# Allegro board SMA_fabB_v1_auto - Copy.brd
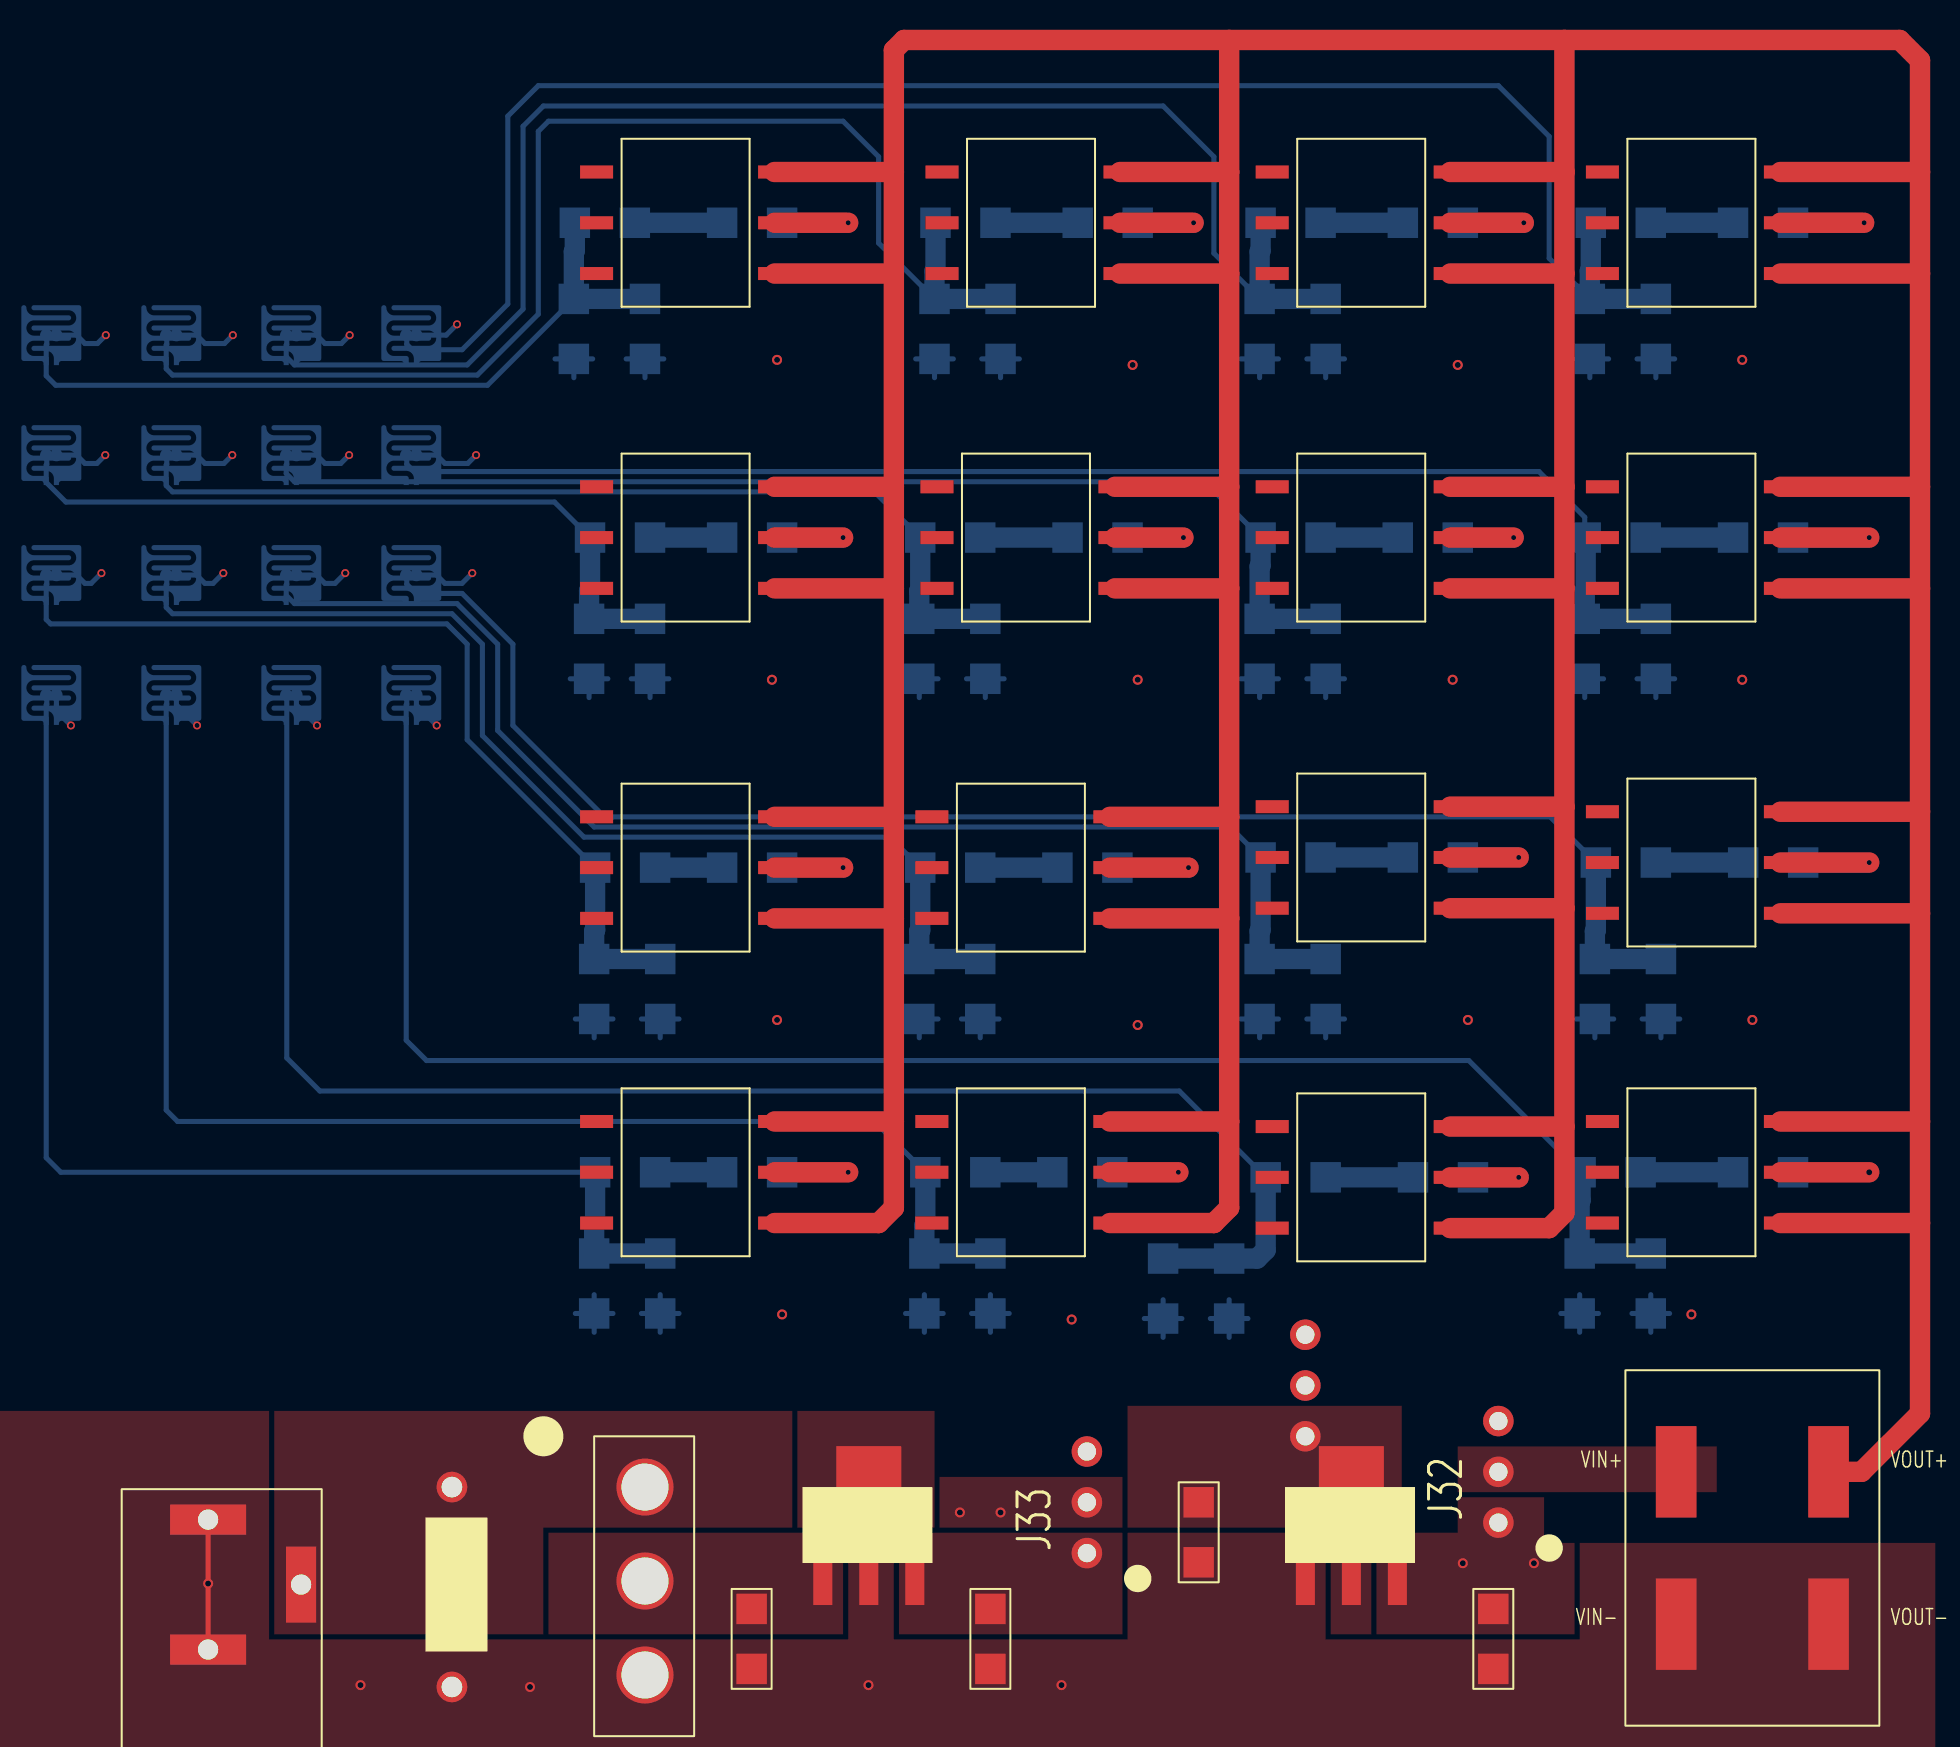
[diagram p0: board, top side]
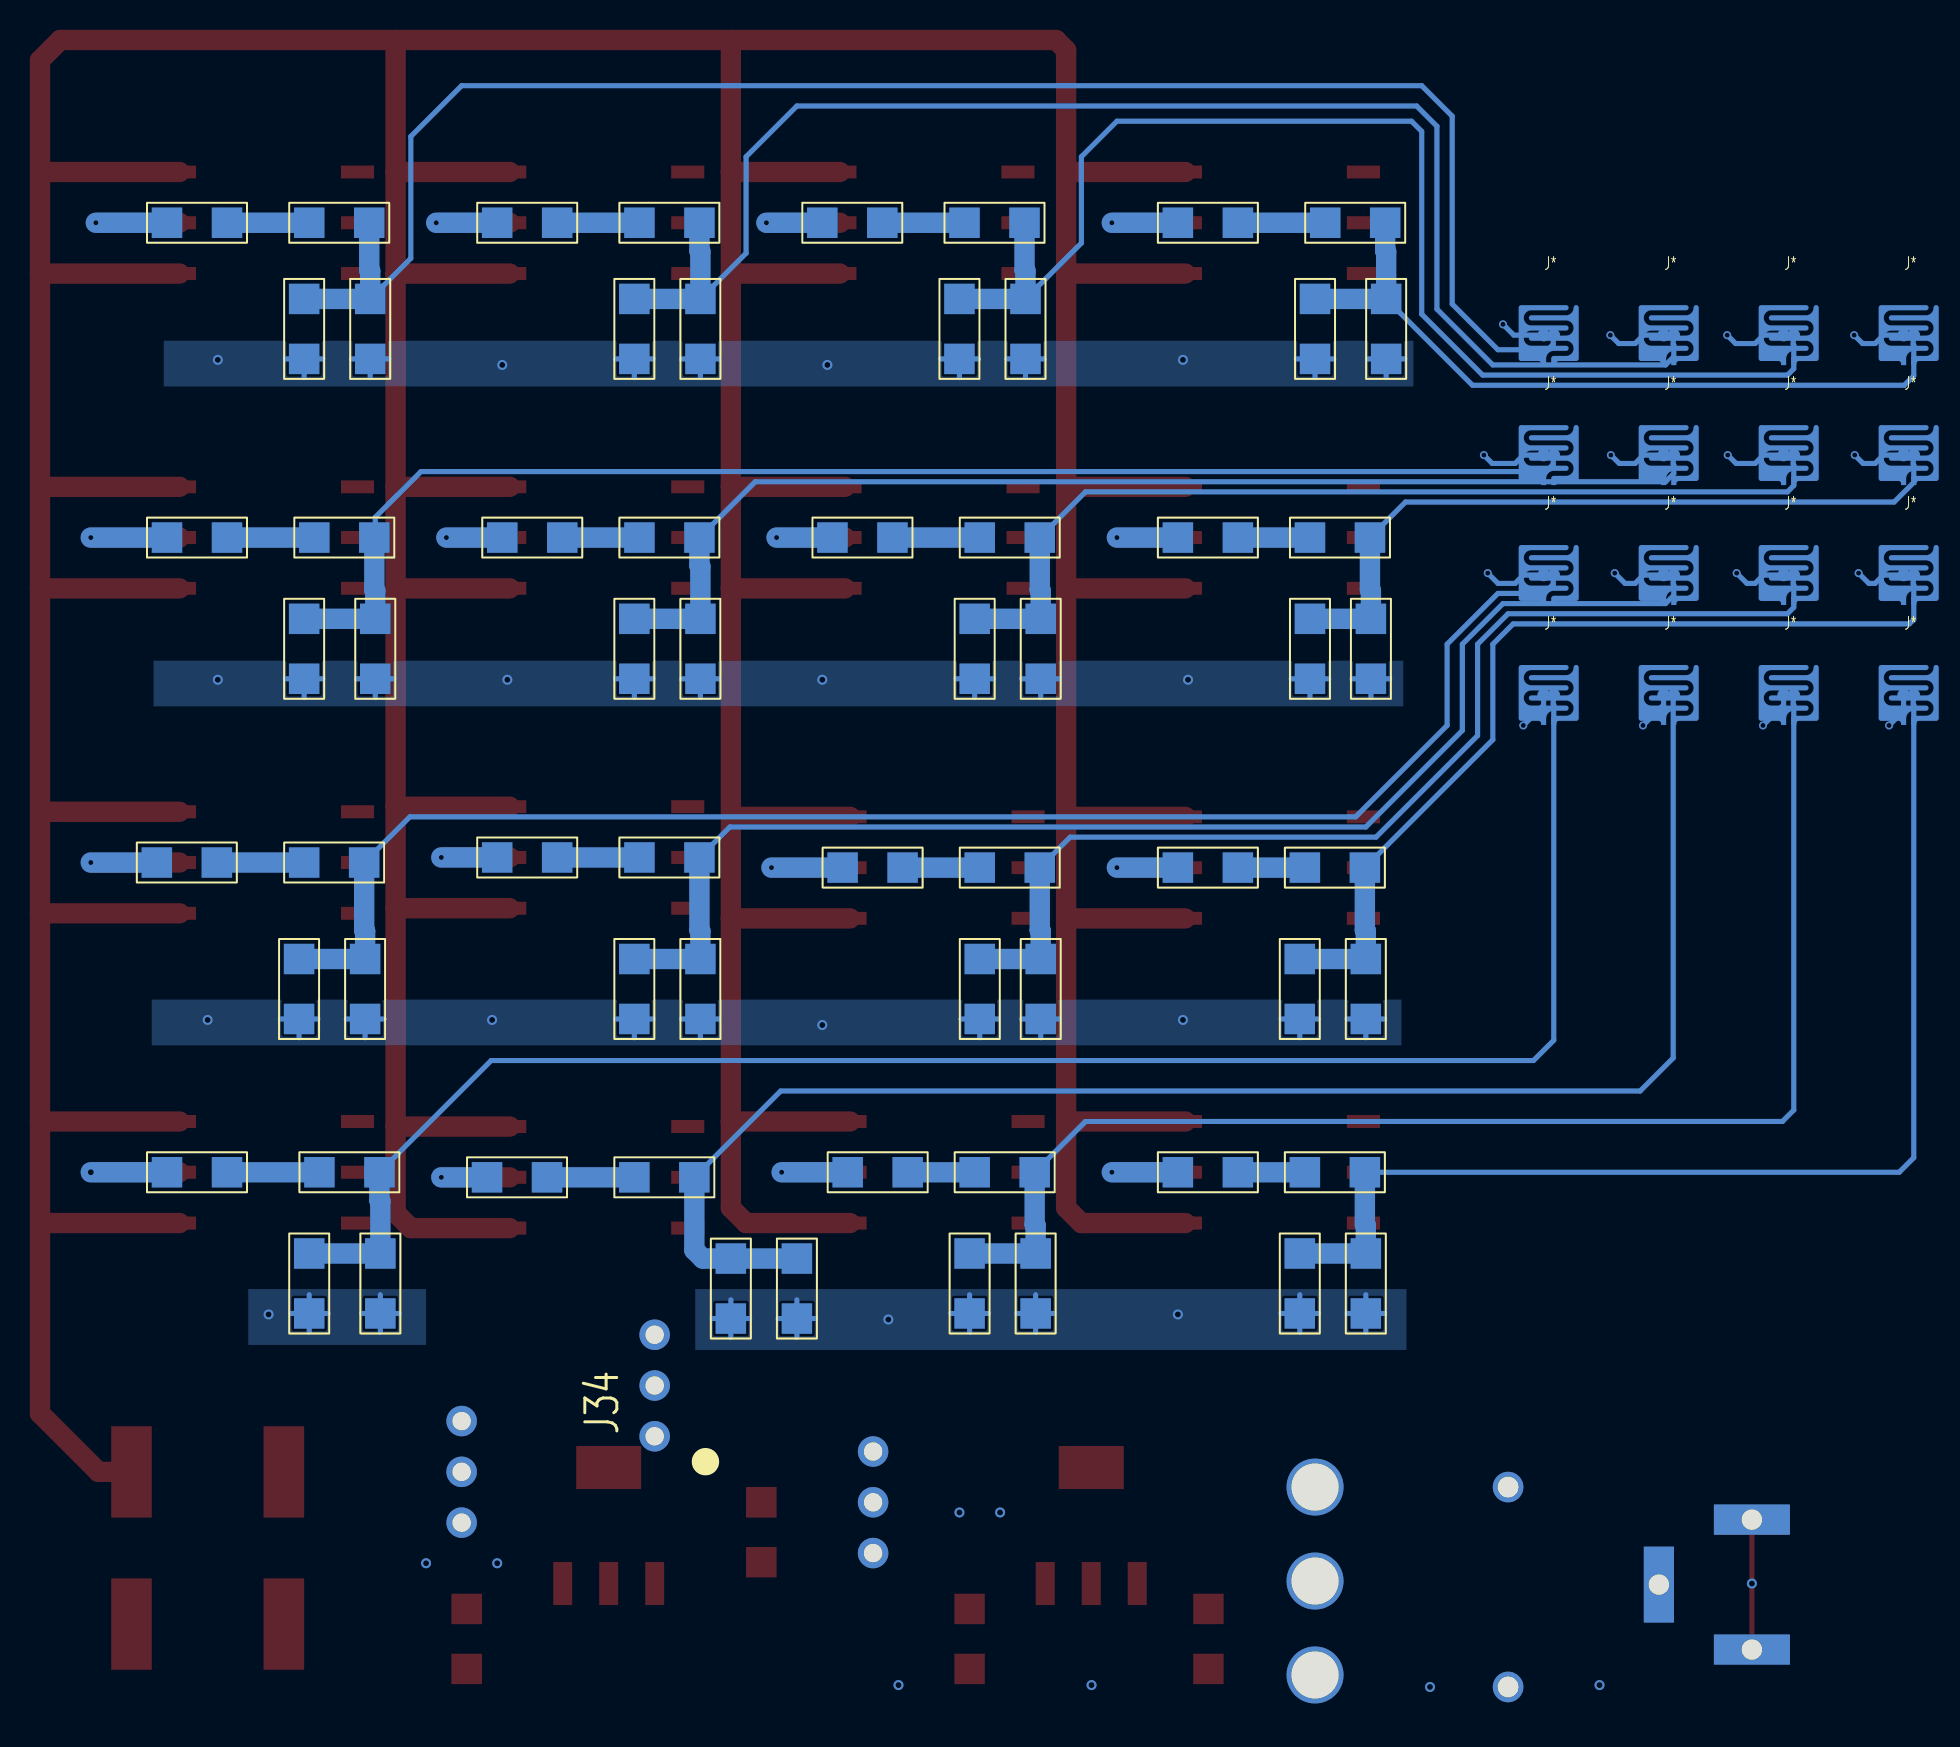
[diagram p1: board, bottom side, seen from below]

No outline. copper layers: TOP, GND, VDD, BOTTOM. Coordinates in mm from the lowest, leftmost part position.

## Design rules (mm)
constraint set DEFAULT: min track width 0.254, pair gap 0.5
net group USB: nets USB_D+ USB_D-
net group USB_CONN: nets USB_D+_CONN USB_D-_CONN
net group USB_FT: nets FT_D+ FT_D-
net group VSTATIC: nets E0_STAT E1_STAT E2_STAT E3_STAT E4_STAT E5_STAT E6_STAT E7_STAT E8_STAT E9_STAT E10_STAT E11_STAT E12_STAT E13_STAT E14_STAT E15_STAT V_STAT

## Placement (name value [footprint] x y rotation side)
C5  0.33uF  [1206_C]  35.02 0 270 top
C6  0.1uF  [1206_C]  46.96 0 270 top
C7  1uF  [1206_C]  72.1 0 270 top
C8  1uF  [1206_C]  57.37 5.33 270 top
C18  0.1uF  [1206_C]  76.42 17.78 270 bottom
C19  0.1uF  [1206_C]  79.98 17.78 270 bottom
C20  0.1uF  [1206_C]  77.18 32.51 270 bottom
C21  0.1uF  [1206_C]  80.48 32.51 270 bottom
C22  0.1uF  [1206_C]  76.67 49.53 270 bottom
C23  0.1uF  [1206_C]  80.23 49.53 270 bottom
C24  0.1uF  [1206_C]  76.93 65.53 270 bottom
C25  0.1uF  [1206_C]  80.23 65.53 270 bottom
C26  0.1uF  [1206_C]  55.59 17.53 270 bottom
C27  0.1uF  [1206_C]  58.89 17.53 270 bottom
C28  0.1uF  [1206_C]  60.42 32.51 270 bottom
C29  0.1uF  [1206_C]  63.72 32.51 270 bottom
C30  0.1uF  [1206_C]  60.42 49.53 270 bottom
C31  0.1uF  [1206_C]  63.72 49.53 270 bottom
C32  0.1uF  [1206_C]  63.72 65.53 270 bottom
C33  0.1uF  [1206_C]  60.42 65.53 270 bottom
C34  0.1uF  [1206_C]  43.65 17.78 270 bottom
C35  0.1uF  [1206_C]  46.96 17.78 270 bottom
C36  0.1uF  [1206_C]  43.4 32.51 270 bottom
C37  0.1uF  [1206_C]  46.45 32.51 270 bottom
C38  0.1uF  [1206_C]  43.4 49.53 270 bottom
C39  0.1uF  [1206_C]  46.7 49.53 270 bottom
C40  0.1uF  [1206_C]  44.16 65.53 270 bottom
C41  0.1uF  [1206_C]  47.46 65.53 270 bottom
C42  0.1uF  [1206_C]  30.45 17.78 270 bottom
C43  0.1uF  [1206_C]  27.14 17.78 270 bottom
C44  0.1uF  [1206_C]  27.14 32.51 270 bottom
C45  0.1uF  [1206_C]  30.45 32.51 270 bottom
C46  0.1uF  [1206_C]  26.89 49.53 270 bottom
C47  0.1uF  [1206_C]  29.94 49.53 270 bottom
C48  0.1uF  [1206_C]  26.13 65.53 270 bottom
C49  0.1uF  [1206_C]  29.68 65.53 270 bottom
D5  -  [SA14A]  20.03 6.1 270 top
J3  EJ503A_0  [EJ503A]  7.84 4.47 0 top
J14  -  [1103M2S3CQE2]  29.68 6.1 0 top
J15  comb_electrode  [COMB_ELECTRODE_FULL]  18 46.74 180 bottom
J16  comb_electrode  [COMB_ELECTRODE_FULL]  18 52.74 180 bottom
J17  comb_electrode  [COMB_ELECTRODE_FULL]  18 58.74 180 bottom
J18  comb_electrode  [COMB_ELECTRODE_FULL]  18 64.74 180 bottom
J19  comb_electrode  [COMB_ELECTRODE_FULL]  12 46.74 180 bottom
J20  comb_electrode  [COMB_ELECTRODE_FULL]  12 52.74 180 bottom
J21  comb_electrode  [COMB_ELECTRODE_FULL]  12 58.74 180 bottom
J22  comb_electrode  [COMB_ELECTRODE_FULL]  12 64.74 180 bottom
J23  comb_electrode  [COMB_ELECTRODE_FULL]  6 46.74 180 bottom
J24  comb_electrode  [COMB_ELECTRODE_FULL]  6 52.74 180 bottom
J25  comb_electrode  [COMB_ELECTRODE_FULL]  6 58.74 180 bottom
J26  comb_electrode  [COMB_ELECTRODE_FULL]  6 64.74 180 bottom
J27  comb_electrode  [COMB_ELECTRODE_FULL]  0 46.74 180 bottom
J28  comb_electrode  [COMB_ELECTRODE_FULL]  0 52.74 180 bottom
J29  comb_electrode  [COMB_ELECTRODE_FULL]  0 58.74 180 bottom
J30  comb_electrode  [COMB_ELECTRODE_FULL]  0 64.74 180 bottom
J32  HDR3x1  [CONN3]  72.36 4.32 90 top
J33  HDR3x1  [CONN3]  51.78 2.79 90 top
J34  HDR3x1  [CONN3]  62.7 8.64 90 bottom
R16  1M  [1206_R]  87.09 21.84 180 bottom
R17  1M  [1206_R]  79.47 21.84 180 bottom
R18  1M  [1206_R]  87.6 37.34 180 bottom
R19  1M  [1206_R]  80.23 37.34 180 bottom
R20  1M  [1206_R]  87.09 53.59 180 bottom
R21  1M  [1206_R]  79.72 53.59 180 bottom
R22  1M  [1206_R]  87.09 69.34 180 bottom
R23  1M  [1206_R]  79.98 69.34 180 bottom
R24  1M  [1206_R]  71.09 21.59 180 bottom
R25  1M  [1206_R]  63.72 21.59 180 bottom
R26  1M  [1206_R]  70.58 37.59 180 bottom
R27  1M  [1206_R]  63.47 37.59 180 bottom
R28  1M  [1206_R]  70.32 53.59 180 bottom
R29  1M  [1206_R]  63.47 53.59 180 bottom
R30  1M  [1206_R]  70.58 69.34 180 bottom
R31  1M  [1206_R]  63.47 69.34 180 bottom
R32  1M  [1206_R]  53.05 21.84 180 bottom
R33  1M  [1206_R]  46.7 21.84 180 bottom
R34  1M  [1206_R]  53.31 37.08 180 bottom
R35  1M  [1206_R]  46.45 37.08 180 bottom
R36  1M  [1206_R]  53.81 53.59 180 bottom
R37  1M  [1206_R]  46.45 53.59 180 bottom
R38  1M  [1206_R]  54.32 69.34 180 bottom
R39  1M  [1206_R]  47.21 69.34 180 bottom
R40  1M  [1206_R]  36.54 21.84 180 bottom
R41  1M  [1206_R]  30.19 21.84 180 bottom
R42  1M  [1206_R]  36.54 37.08 180 bottom
R43  1M  [1206_R]  30.19 37.08 180 bottom
R44  1M  [1206_R]  36.54 53.59 180 bottom
R45  1M  [1206_R]  29.94 53.59 180 bottom
R46  1M  [1206_R]  36.54 69.34 180 bottom
R47  1M  [1206_R]  29.18 69.34 180 bottom
U3  -  [UA78M05CDCY]  38.57 1.27 0 top
U4  TLV1117LV33DCYT_1  [TLV1117LV33DCYT]  62.7 1.27 0 top
U5  -  [B00JVJDEZE]  81.25 4.32 0 top
U9  -  [PLA170]  82.01 21.84 0 top
U10  -  [PLA170]  82.01 37.34 0 top
U11  -  [PLA170]  82.01 53.59 0 top
U12  -  [PLA170]  82.01 69.34 0 top
U13  -  [PLA170]  65.5 21.59 0 top
U14  -  [PLA170]  65.5 37.59 0 top
U15  -  [PLA170]  65.5 53.59 0 top
U16  -  [PLA170]  65.5 69.34 0 top
U17  -  [PLA170]  48.48 21.84 0 top
U18  -  [PLA170]  48.48 37.08 0 top
U19  -  [PLA170]  48.73 53.59 0 top
U20  -  [PLA170]  48.99 69.34 0 top
U21  -  [PLA170]  31.72 21.84 0 top
U22  -  [PLA170]  31.72 37.08 0 top
U23  -  [PLA170]  31.72 53.59 0 top
U24  -  [PLA170]  31.72 69.34 0 top

## Library data of the parts
C5-C8 C18-C49 = CAP
D5 = SA14A_0
J3 = EJ503A_0
J14 = 1103M2S3CQE2
J15-J30 = comb_electrode_1
J32-J34 = HDR3x1
R16-R47 = RESISTOR
U3 = UA78M05CDCY_0
U4 = TLV1117LV33DCYT_2
U5 = B00JVJDEZE
U9-U24 = PLA170

## Footprints (pads in the part's own frame, mm; a bottom-side part is the same pattern mirrored in y, then rotated)
1103M2S3CQE2
  round 2.85 hole 2.35: 1(0,0) 2(0,-4.7) 3(0,-9.4)
1206_C
  rect 1.524x1.524 smd: 1(0,0) 2(3,0)
1206_R
  rect 1.524x1.524 smd: 1(0,0) 2(3,0)
B00JVJDEZE
  rect 2.032x4.572 smd: 1(0,2.54) 2(0,-5.08) 3(7.62,2.54) 4(7.62,-5.08)
COMB_ELECTRODE_FULL
  custom 2.492x3 smd: 1(-0.254,-1.016)
  custom 2.491x3 smd: 2(0.254,-1.016)
CONN3
  round 1.524 hole 0.914: 1(0,0) 2(2.54,0) 3(5.08,0)
EJ503A
  rect 1.51x3.8 hole 1.01: 1(4.65,-3.25)
  rect 3.8x1.51 hole 1.01: 2(0,0) 3(0,-6.5)
PLA170
  rect 1.65x0.65 smd: 1(-4.45,2.54) 2(-4.45,0) 3(-4.45,-2.54) 4(4.45,-2.54) 5(4.45,0) 6(4.45,2.54)
SA14A
  round 1.53 hole 1.03: 1(0,0) 2(10,0)
TLV1117LV33DCYT
  rect 0.95x2.15 smd: 1(0,0) 2(2.3,0) 3(4.6,0)
  rect 3.25x2.15 smd: 4(2.3,5.8)
UA78M05CDCY
  rect 0.95x2.15 smd: 1(0,0) 2(2.3,0) 3(4.6,0)
  rect 3.25x2.15 smd: 4(2.3,5.8)

## Nets
+3V3: J34.2
+3V3_VR: C8.1 J34.1 U4.2 U4.4(VOUT_TAB)
+5V: C7.1 J32.1 J33.2 U4.3
+5V_VR: C6.1 J33.1 U3.3(VOUT)
+12V: C5.1 J14.2 U3.1
+12V_SW: D5.1 J3.1 J14.1
GND: C5.2 C6.2 C7.2 C8.2 C18.2 C19.2 C20.2 C21.2 C22.2 C23.2 C24.2 C25.2 C26.2 C27.2 C28.2 C29.2 C30.2 C31.2 C32.2 C33.2 C34.2 C35.2 C36.2 C37.2 C38.2 C39.2 C40.2 C41.2 C42.2 C43.2 C44.2 C45.2 C46.2 C47.2 C48.2 C49.2 D5.2(-) J3.2(V-) J3.3 J14.3 J15.1(-) J16.1(-) J17.1(-) J18.1(-) J19.1(-) J20.1(-) J21.1(-) J22.1(-) J23.1(-) J24.1(-) J25.1(-) J26.1(-) J27.1(-) J28.1(-) J29.1(-) J30.1(-) U3.2 U3.4 U4.1 U5.2 U5.4(VOUT-) U9.2 U10.2 U11.2 U12.2 U13.2 U14.2 U15.2 U16.2 U17.2 U18.2 U19.2 U20.2 U21.2 U22.2 U23.2 U24.2
E0_ON: U9.1
E0_STAT: C18.1 C19.1 J15.2 R17.2
E1_ON: U11.1
E1_STAT: C22.1 C23.1 J17.2 R21.2
E2_ON: U13.1
E2_STAT: C26.1 C27.1 J19.2 R25.2
E3_ON: U15.1
E3_STAT: C30.1 C31.1 J21.2 R29.2
E4_ON: U10.1
E4_STAT: C20.1 C21.1 J16.2 R19.2
E5_ON: U12.1
E5_STAT: C24.1 C25.1 J18.2 R23.2
E6_ON: U14.1
E6_STAT: C28.1 C29.1 J20.2 R27.2
E7_ON: U16.1
E7_STAT: C32.1 C33.1 J22.2 R31.2
E8_ON: U17.1
E8_STAT: C34.1 C35.1 J23.2 R33.2
E9_ON: U19.1
E9_STAT: C38.1 C39.1 J25.2 R37.2
E10_ON: U21.1
E10_STAT: C42.1 C43.1 J27.2 R41.2
E11_ON: U23.1
E11_STAT: C46.1 C47.1 J29.2 R45.2
E12_ON: U18.1
E12_STAT: C36.1 C37.1 J24.2 R35.2
E13_ON: U20.1
E13_STAT: C40.1 C41.1 J26.2 R39.2
E14_ON: U22.1
E14_STAT: C44.1 C45.1 J28.2 R43.2
E15_ON: U24.1
E15_STAT: C48.1 C49.1 J30.2 R47.2
V_STAT: U5.3 U9.4 U9.6 U10.4 U10.6 U11.4 U11.6 U12.4 U12.6 U13.4 U13.6 U14.4 U14.6 U15.4 U15.6 U16.4 U16.6 U17.4 U17.6 U18.4 U18.6 U19.4 U19.6 U20.4 U20.6 U21.4 U21.6 U22.4 U22.6 U23.4 U23.6 U24.4 U24.6
VSTAT_IN: J32.2 U5.1
N30432: R16.1 U9.5
N30436: R16.2 R17.1
N32192: R18.1 U10.5
N32196: R18.2 R19.1
N32981: R20.1 U11.5
N32985: R20.2 R21.1
N33019: R22.1 U12.5
N33023: R22.2 R23.1
N34350: R24.1 U13.5
N34354: R24.2 R25.1
N34388: R26.1 U14.5
N34392: R26.2 R27.1
N34774: R28.1 U15.5
N34778: R28.2 R29.1
N34812: R30.1 U16.5
N34816: R30.2 R31.1
N38126: R32.1 U17.5
N38130: R32.2 R33.1
N38164: R34.1 U18.5
N38168: R34.2 R35.1
N38546: R36.1 U19.5
N38550: R36.2 R37.1
N38584: R38.1 U20.5
N38588: R38.2 R39.1
N38966: R40.1 U21.5
N38970: R40.2 R41.1
N39004: R42.1 U22.5
N39008: R42.2 R43.1
N39386: R44.1 U23.5
N39390: R44.2 R45.1
N39424: R46.1 U24.5
N39428: R46.2 R47.1

Pads without a net: J32 3; J33 3; J34 3; U9 3; U10 3; U11 3; U12 3; U13 3; U14 3; U15 3; U16 3; U17 3; U18 3; U19 3; U20 3; U21 3; U22 3; U23 3; U24 3

## Via types
v1: diameter 0.4, hole 0.25, TOP to BOTTOM, 31 vias
v2: diameter 0.5, hole 0.3, TOP to BOTTOM, 25 vias

## Routing (per net, layer and track width the routed paths; a pad name or vN(x,y) marks a point on that pad's centre or on a via; arc(x,y) is an arc through that point)
+5V: length 7
  VDD w0.254: 50.91,5.33 J33.2 ; J33.2 51.78,4.46 ; J33.2 51.78,6.21 ; J33.2 52.66,5.33 ; J32.1 73.23,4.32 ; J32.1 71.48,4.32 ; J32.1 72.36,5.19 ; J32.1 72.36,3.44
  vias: v2(45.43,4.83) v2(47.46,4.83) v2(70.58,2.29) v2(74.13,2.29)
GND: length 169.1
  TOP w0.254: J3.2 v2(7.84,1.27) J3.3
  GND w0.254: 28.08,-3.3 J14.3 ; J14.3 29.68,-4.91 ; J14.3 31.29,-3.3 ; J14.3 29.68,-1.7 ; D5.2 20.03,-2.96 ; D5.2 20.97,-3.9 ; D5.2 20.03,-4.85 ; D5.2 19.09,-3.9 ; 5.76,-2.03 J3.3 ; J3.3 7.84,-2.97 ; J3.3 9.92,-2.03 ; J3.3 7.84,-1.1 ; J3.2 9.92,4.47 ; J3.2 7.84,3.53 ; J3.2 5.76,4.47 ; J3.2 7.84,5.4
  BOTTOM w0.254: v1(14.92,63.72) 14.5,63.3 13.68,63.3 13.26,63.72 J22.1 ; 29.68,61.59 C49.2 ; C49.2 28.74,62.53 ; C49.2 30.62,62.53 ; C35.2 46.96,15.72 ; C35.2 46.96,13.84 ; C35.2 46.02,14.78 ; C35.2 47.9,14.78 ; C43.2 28.08,14.78 ; C43.2 27.14,15.72 ; C43.2 27.14,13.84 ; C43.2 26.2,14.78 ; 57.95,14.53 C27.2 ; C27.2 58.89,13.59 ; C27.2 58.89,15.47 ; C27.2 59.83,14.53 ; 60.42,45.59 C30.2 ; C30.2 59.48,46.53 ; C30.2 61.36,46.53 ; C34.2 44.59,14.78 ; C34.2 43.65,13.84 ; C34.2 43.65,15.72 ; C34.2 42.71,14.78 ; 76.67,45.59 C22.2 ; C22.2 75.73,46.53 ; C22.2 77.61,46.53 ; J30.1 1.26,63.72 1.68,63.3 2.31,63.3 v1(2.73,63.72) ; J16.1 19.26,51.72 19.68,51.3 20.53,51.3 v1(21.05,51.82) ; C32.2 64.66,62.53 ; C32.2 62.78,62.53 ; C32.2 63.72,61.59 ; C29.2 64.66,29.51 ; C29.2 63.72,28.57 ; C29.2 62.78,29.51 ; v1(2.7,57.72) 2.28,57.3 1.68,57.3 1.26,57.72 J29.1 ; 75.99,62.53 C24.2 ; C24.2 76.93,61.59 ; C24.2 77.87,62.53 ; J28.1 1.26,51.72 1.68,51.3 1.99,51.3 v1(2.51,51.82) ; C41.2 48.4,62.53 ; C41.2 47.46,61.59 ; C41.2 46.52,62.53 ; 46.7,45.59 C39.2 ; C39.2 47.64,46.53 ; C39.2 45.76,46.53 ; v1(21.24,57.72) 20.82,57.3 19.68,57.3 19.26,57.72 J17.1 ; v1(14.7,51.82) 14.18,51.3 13.68,51.3 13.26,51.72 J20.1 ; 60.42,61.59 C33.2 ; C33.2 59.48,62.53 ; C33.2 61.36,62.53 ; C44.2 28.08,29.51 ; C44.2 27.14,28.57 ; C44.2 26.2,29.51 ; v1(20.29,64.26) 19.74,63.72 J18.1 ; C47.2 30.88,46.53 ; C47.2 29,46.53 ; C47.2 29.94,45.59 ; 79.54,29.51 C21.2 ; C21.2 80.48,28.57 ; C21.2 81.42,29.51 ; 44.16,61.59 C40.2 ; C40.2 45.1,62.53 ; C40.2 43.22,62.53 ; 79.29,46.53 C23.2 ; C23.2 80.23,45.59 ; C23.2 81.17,46.53 ; v1(14.89,57.72) 14.47,57.3 13.68,57.3 13.26,57.72 J21.1 ; v1(19.27,44.2) 18.26,45.21 18.26,45.72 J15.1 ; 43.4,28.57 C36.2 ; C36.2 42.46,29.51 ; C36.2 44.34,29.51 ; 26.89,45.59 C46.2 ; C46.2 25.95,46.53 ; C46.2 27.83,46.53 ; 75.48,14.78 C18.2 ; C18.2 76.42,15.72 ; C18.2 77.36,14.78 ; C18.2 76.42,13.84 ; C28.2 61.36,29.51 ; C28.2 60.42,28.57 ; C28.2 59.48,29.51 ; C37.2 47.39,29.51 ; C37.2 46.45,28.57 ; C37.2 45.51,29.51 ; v1(0.98,44.2) 0.25,44.92 0.25,45.23 0.26,45.23 0.26,45.72 J27.1 ; 26.13,61.59 C48.2 ; C48.2 25.19,62.53 ; C48.2 27.07,62.53 ; C42.2 31.39,14.78 ; C42.2 30.45,13.84 ; C42.2 30.45,15.72 ; C42.2 29.51,14.78 ; 80.23,61.59 C25.2 ; C25.2 79.29,62.53 ; C25.2 81.17,62.53 ; C26.2 55.59,15.47 ; C26.2 55.59,13.59 ; C26.2 54.65,14.53 ; C26.2 56.53,14.53 ; J19.1 12.26,45.72 12.26,45.23 v1(13.29,44.2) ; C45.2 31.39,29.51 ; C45.2 29.51,29.51 ; C45.2 30.45,28.57 ; 77.18,28.57 C20.2 ; C20.2 76.24,29.51 ; C20.2 78.12,29.51 ; 62.78,46.53 C31.2 ; C31.2 64.66,46.53 ; C31.2 63.72,45.59 ; C38.2 44.34,46.53 ; C38.2 42.46,46.53 ; C38.2 43.4,45.59 ; 79.04,14.78 C19.2 ; C19.2 80.92,14.78 ; C19.2 79.98,15.72 ; C19.2 79.98,13.84 ; J23.1 6.26,45.72 6.26,45.23 v1(7.29,44.2) ; v1(9.08,63.72) 8.66,63.3 7.68,63.3 7.26,63.72 J26.1 ; J24.1 7.26,51.72 7.68,51.3 8.09,51.3 v1(8.6,51.82) ; v1(9.05,57.72) 8.63,57.3 7.68,57.3 7.26,57.72 J25.1
  vias: v2(15.46,-3.81) v2(23.94,-3.9) v2(36.03,46.48) v2(36.29,62.48) v2(36.29,29.46) v2(36.54,14.73) v2(40.86,-3.81) v2(50.51,-3.81) v2(51.02,14.48) v2(54.07,62.23) v2(54.32,46.48) v2(54.32,29.21) v2(70.07,46.48) v2(70.32,62.23) v2(70.83,29.46) v2(82.01,14.73) v2(84.55,62.48) v2(84.55,46.48) v2(85.06,29.46)
E0_STAT: length 86.4
  BOTTOM w0.254: J15.2 17.77,45.69 17.77,45.26 17.75,45.23 17.75,28.45 18.76,27.43 70.88,27.43 R17.2
  BOTTOM w1.016: R17.2 76.47,20.45 76.42,20.4 C18.1 C19.1
E1_STAT: length 69.1
  BOTTOM w0.254: R21.2 76.67,53.64 76.67,54.61 74.39,56.9 18.14,56.9 17.77,57.26 17.77,57.69 J17.2
  BOTTOM w1.016: C23.1 C22.1 76.67,50.93 76.72,50.98 R21.2
E2_STAT: length 78.5
  BOTTOM w0.254: R25.2 56.4,25.91 13.43,25.91 11.77,27.56 11.77,45.69 J19.2
  BOTTOM w1.016: C26.1 C27.1 60.29,17.53 60.72,17.96 R25.2
E3_STAT: length 58.4
  BOTTOM w0.254: J21.2 11.77,57.69 11.77,57.26 11.75,57.23 11.75,56.8 12.16,56.39 57.67,56.39 R29.2
  BOTTOM w1.016: C31.1 C30.1 60.42,52.15 60.47,52.2 R29.2
E4_STAT: length 76.2
  BOTTOM w0.254: J16.2 17.77,51.69 17.77,51.26 18.23,50.8 20.54,50.8 23.08,48.26 23.08,44.2 27.65,39.62 74.94,39.62 R19.2
  BOTTOM w1.016: C21.1 C20.1 77.18,33.91 77.23,33.96 R19.2
E5_STAT: length 85.8
  BOTTOM w0.254: J18.2 17.77,63.69 17.77,63.26 18.04,62.99 20.54,62.99 22.83,65.28 22.83,74.68 24.35,76.2 72.36,76.2 74.9,73.66 74.9,67.56 C24.1
  BOTTOM w1.016: C25.1 C24.1 76.93,66.93 76.98,66.98 R23.2
E6_STAT: length 66.1
  BOTTOM w0.254: R27.2 58.94,39.12 27.14,39.12 22.32,43.94 22.32,48.26 20.29,50.29 12.16,50.29 11.75,50.7 11.75,51.23 11.77,51.26 11.77,51.69 J20.2
  BOTTOM w1.016: R27.2 60.47,33.96 60.42,33.91 C28.1 C29.1
E7_STAT: length 74.6
  BOTTOM w0.254: J22.2 11.77,63.69 11.77,63.26 11.75,63.23 11.75,62.64 12.16,62.23 20.79,62.23 23.59,65.02 23.59,74.17 24.6,75.18 55.59,75.18 58.13,72.64 58.13,67.82 C33.1
  BOTTOM w1.016: C32.1 C33.1 60.42,67.9 60.47,67.95 R31.2
E8_STAT: length 67.4
  BOTTOM w0.254: R33.2 41.16,24.38 6.32,24.38 5.75,24.95 5.75,45.23 5.77,45.26 5.77,45.69 J23.2
  BOTTOM w1.016: R33.2 43.7,19.23 43.65,19.18 C34.1 C35.1
E9_STAT: length 47.7
  BOTTOM w0.254: J25.2 5.77,57.69 5.77,57.26 5.75,57.23 5.75,56.2 6.06,55.88 41.16,55.88 R37.2
  BOTTOM w1.016: R37.2 43.45,50.98 43.4,50.93 C38.1 C39.1
E10_STAT: length 58.3
  BOTTOM w0.254: J27.2 -0.23,45.69 -0.23,45.26 -0.25,45.23 -0.25,22.57 0.47,21.84 R41.2
  BOTTOM w1.016: C42.1 C43.1 27.14,19.18 27.19,19.23 R41.2
E11_STAT: length 36.9
  BOTTOM w0.254: R45.2 25.16,55.37 0.73,55.37 -0.25,56.35 -0.25,57.23 -0.23,57.26 -0.23,57.69 J29.2
  BOTTOM w1.016: R45.2 26.94,50.98 26.89,50.93 C46.1 C47.1
E12_STAT: length 55.1
  BOTTOM w0.254: J24.2 5.77,51.69 5.77,51.26 5.75,51.23 5.75,50.1 6.06,49.78 20.03,49.78 21.56,48.26 21.56,43.69 26.64,38.61 41.92,38.61 R35.2
  BOTTOM w1.016: C37.1 C36.1 43.4,33.91 43.45,33.96 R35.2
E13_STAT: length 64.2
  BOTTOM w0.254: J26.2 5.77,63.69 5.77,63.26 5.75,63.23 5.75,62.04 6.06,61.72 21.3,61.72 24.35,64.77 24.35,73.91 24.86,74.42 39.59,74.42 41.37,72.64 41.37,68.33 C40.1
  BOTTOM w1.016: C41.1 C40.1 44.16,66.93 44.21,66.98 R39.2
E14_STAT: length 45.5
  BOTTOM w0.254: J28.2 -0.23,51.69 -0.23,51.26 -0.25,51.23 -0.25,49.5 -0.03,49.28 19.78,49.28 20.79,48.26 20.79,43.48 R43.2
  BOTTOM w1.016: R43.2 27.19,33.96 27.14,33.91 C44.1 C45.1
E15_STAT: length 37.8
  BOTTOM w0.254: C48.1 21.81,61.21 0.22,61.21 -0.25,61.69 -0.25,63.23 -0.23,63.26 -0.23,63.69 J30.2
  BOTTOM w1.016: C49.1 C48.1 26.13,67.9 26.18,67.95 R47.2
V_STAT: length 496.8
  TOP w1.016: U12.4 93.44,66.8 ; 93.44,66.8 93.44,56.13 ; 93.44,66.8 93.44,71.88 ; U11.4 93.44,51.05 ; 93.44,51.05 93.44,56.13 ; 93.44,51.05 93.44,39.88 ; 93.44,56.13 U11.6 ; U24.6 42.13,71.88 ; 42.13,71.88 42.13,66.8 ; 42.13,71.88 42.13,77.98 42.64,78.49 58.89,78.49 ; U19.6 58.89,56.13 ; 58.89,56.13 58.89,66.8 ; 58.89,56.13 58.89,51.05 ; 58.89,78.49 75.66,78.49 ; 58.89,78.49 58.89,71.88 ; 58.89,66.8 58.89,71.88 ; 58.89,66.8 U20.4 ; 58.89,71.88 U20.6 ; U24.4 42.13,66.8 ; 42.13,66.8 42.13,56.13 ; U21.4 41.37,19.3 42.13,20.07 42.13,24.38 ; U5.3 90.52,6.86 93.44,9.78 93.44,19.3 ; 75.66,71.88 75.66,78.49 ; 75.66,71.88 U16.6 ; 75.66,71.88 75.66,66.8 ; 75.66,78.49 92.42,78.49 93.44,77.47 93.44,71.88 ; U18.6 58.89,39.62 ; 58.89,39.62 58.89,34.54 ; 58.89,39.62 58.89,51.05 ; U23.6 42.13,56.13 ; 42.13,56.13 42.13,51.05 ; 58.89,24.38 58.89,20.07 58.13,19.3 U17.4 ; 58.89,24.38 U17.6 ; 58.89,24.38 58.89,34.54 ; U13.4 74.9,19.05 75.66,19.81 75.66,24.13 ; 58.89,34.54 U18.4 ; 75.66,35.05 75.66,40.13 ; 75.66,35.05 U14.4 ; 75.66,35.05 75.66,24.13 ; 75.66,40.13 75.66,51.05 ; 75.66,40.13 U14.6 ; U9.4 93.44,19.3 ; 93.44,19.3 93.44,24.38 ; U16.4 75.66,66.8 ; 75.66,66.8 75.66,56.13 ; 42.13,24.38 42.13,34.54 ; 42.13,24.38 U21.6 ; U22.6 42.13,39.62 ; 42.13,39.62 42.13,51.05 ; 42.13,39.62 42.13,34.54 ; U10.4 93.44,34.8 ; 93.44,34.8 93.44,24.38 ; 93.44,34.8 93.44,39.88 ; 42.13,51.05 U23.4 ; 42.13,34.54 U22.4 ; 93.44,71.88 U12.6 ; 93.44,39.88 U10.6 ; U19.4 58.89,51.05 ; 75.66,24.13 U13.6 ; 93.44,24.38 U9.6 ; 75.66,51.05 U15.4 ; 75.66,51.05 75.66,56.13 ; U15.6 75.66,56.13
N30432: length 8.2
  TOP w1.016: U9.5 v2(90.9,21.84)
  BOTTOM w1.016: R16.1 v2(90.9,21.84)
N30436: length 4.6
  BOTTOM w1.016: R17.1 R16.2
N32192: length 7.7
  TOP w1.016: U10.5 v1(90.9,37.34)
  BOTTOM w1.016: v1(90.9,37.34) R18.1
N32196: length 4.4
  BOTTOM w1.016: R18.2 R19.1
N32981: length 8.2
  TOP w1.016: U11.5 v1(90.9,53.59)
  BOTTOM w1.016: R20.1 v1(90.9,53.59)
N32985: length 4.4
  BOTTOM w1.016: R21.1 R20.2
N33019: length 7.7
  TOP w1.016: U12.5 v1(90.64,69.34)
  BOTTOM w1.016: v1(90.64,69.34) R22.1
N33023: length 4.1
  BOTTOM w1.016: R22.2 R23.1
N34350: length 5.7
  TOP w1.016: U13.5 v1(73.37,21.59)
  BOTTOM w1.016: R24.1 v1(73.37,21.59)
N34354: length 4.4
  BOTTOM w1.016: R25.1 R24.2
N34388: length 6.2
  TOP w1.016: U14.5 v1(73.37,37.59)
  BOTTOM w1.016: v1(73.37,37.59) R26.1
N34392: length 4.1
  BOTTOM w1.016: R26.2 R27.1
N34774: length 6
  TOP w1.016: U15.5 v1(73.12,53.59)
  BOTTOM w1.016: v1(73.12,53.59) R28.1
N34778: length 3.9
  BOTTOM w1.016: R28.2 R29.1
N34812: length 6.7
  TOP w1.016: U16.5 v1(73.63,69.34)
  BOTTOM w1.016: v1(73.63,69.34) R30.1
N34816: length 4.1
  BOTTOM w1.016: R30.2 R31.1
N38126: length 6.7
  TOP w1.016: U17.5 v1(56.35,21.84)
  BOTTOM w1.016: R32.1 v1(56.35,21.84)
N38130: length 3.4
  BOTTOM w1.016: R33.1 R32.2
N38164: length 7.5
  TOP w1.016: U18.5 v1(56.86,37.08)
  BOTTOM w1.016: R34.1 v1(56.86,37.08)
N38168: length 3.9
  BOTTOM w1.016: R34.2 R35.1
N38546: length 6.2
  TOP w1.016: U19.5 v1(56.61,53.59)
  BOTTOM w1.016: R36.1 v1(56.61,53.59)
N38550: length 4.4
  BOTTOM w1.016: R36.2 R37.1
N38584: length 6.5
  TOP w1.016: U20.5 v1(57.12,69.34)
  BOTTOM w1.016: v1(57.12,69.34) R38.1
N38588: length 4.1
  BOTTOM w1.016: R38.2 R39.1
N38966: length 7
  TOP w1.016: U21.5 v1(39.84,21.84)
  BOTTOM w1.016: R40.1 v1(39.84,21.84)
N38970: length 3.3
  BOTTOM w1.016: R40.2 R41.1
N39004: length 6.5
  TOP w1.016: U22.5 v1(39.59,37.08)
  BOTTOM w1.016: v1(39.59,37.08) R42.1
N39008: length 3.3
  BOTTOM w1.016: R42.2 R43.1
N39386: length 6.5
  TOP w1.016: U23.5 v1(39.59,53.59)
  BOTTOM w1.016: v1(39.59,53.59) R44.1
N39390: length 3.6
  BOTTOM w1.016: R44.2 R45.1
N39424: length 7
  TOP w1.016: U24.5 v1(39.84,69.34)
  BOTTOM w1.016: R46.1 v1(39.84,69.34)
N39428: length 4.4
  BOTTOM w1.016: R46.2 R47.1

## Copper pours and planes (outline as drawn; the poured copper is in the pictures)
+3V3_VR on TOP: 63.97,-1.27 63.97,4.06 53.81,4.06 53.81,10.16 67.53,10.16 67.53,4.06 66.01,4.06 66.01,-1.27
+5V on TOP: 66.26,-1.27 66.26,3.81 70.32,3.81 70.32,5.59 74.64,5.59 74.64,3.3 76.17,3.3 76.17,-1.27
+5V on TOP: 53.56,4.06 53.56,6.6 44.42,6.6 44.42,4.06
+5V on VDD: -4.61,-8.12 -4.61,14.48 95.39,14.48 95.39,-8.12
+5V_VR on TOP: 42.38,-1.27 42.38,3.81 53.56,3.81 53.56,-1.27
+12V on TOP: 24.86,3.81 24.86,-1.27 39.59,-1.27 39.59,3.81
+12V_SW on TOP: 11.14,-1.27 11.14,9.91 37.05,9.91 37.05,4.06 24.6,4.06 24.6,-1.27
GND on TOP: -3.08,-7.62 -3.08,9.91 10.89,9.91 10.89,-1.52 39.84,-1.52 39.84,4.06 37.3,4.06 37.3,9.91 44.16,9.91 44.16,4.06 42.13,4.06 42.13,-1.52 53.81,-1.52 53.81,3.81 63.72,3.81 63.72,-1.52 76.42,-1.52 76.42,3.3 94.2,3.3 94.2,-7.62
GND on BOTTOM: 74.13,16 74.13,13.21 83.02,13.21 83.02,16
GND on BOTTOM: 25.11,16 25.11,12.95 60.67,12.95 60.67,16
GND on BOTTOM: 24.77,63.44 24.77,61.15 87.25,61.15 87.25,63.44
GND on BOTTOM: 25.37,30.48 25.37,28.19 87.85,28.19 87.85,30.48
GND on BOTTOM: 25.27,47.44 25.27,45.15 87.76,45.15 87.76,47.44
GND on GND: -4.61,-7.97 -4.61,82.55 95.39,82.55 95.39,-7.97
VSTAT_IN on TOP: 70.32,5.84 70.32,8.13 83.28,8.13 83.28,5.84

## Text on the board
User.Comments: 02/17/18 | DATE | 0.1 | REV | FAB A RELEASE | DESCRIPTION | AUTHOR | zq2154 | SMA | CREATIVE MACHINES LAB | A
XSECTION_CHART: *  SURFACE | L1 TOP CONDUCTOR | *  DIELECTRIC | L2 GND CONDUCTOR | L3 VDD CONDUCTOR | L4 BOTTOM CONDUCTOR | DESIGN CROSS SECTION CHART | ___________________________ | TOTAL THICKNESS 0.73152 MM | 1-4
PAGE_OUTLINE: Materials provided to you regarding Creative Machines Lab's | product designs are confidential and considered intellectual | property. They may not be shared without our permission. | COMPANY: | TITLE: | CONFIDENTIALITY REMINDER: | FAB:
